# Altium PCB Copy of MB1363.PcbDoc (part 4 of 6)
Units mm, origin at the board's own origin, x right, y up, seen from the top; angles counter-clockwise.
Board outline 60.78 x 109.88 mm, 4 copper layers (Top Layer, Signal Layer 1, Signal Layer 2, Bottom Layer), stack 0.453 mm thick; 231 components, 215 nets, 716 pads, 2915 vias.
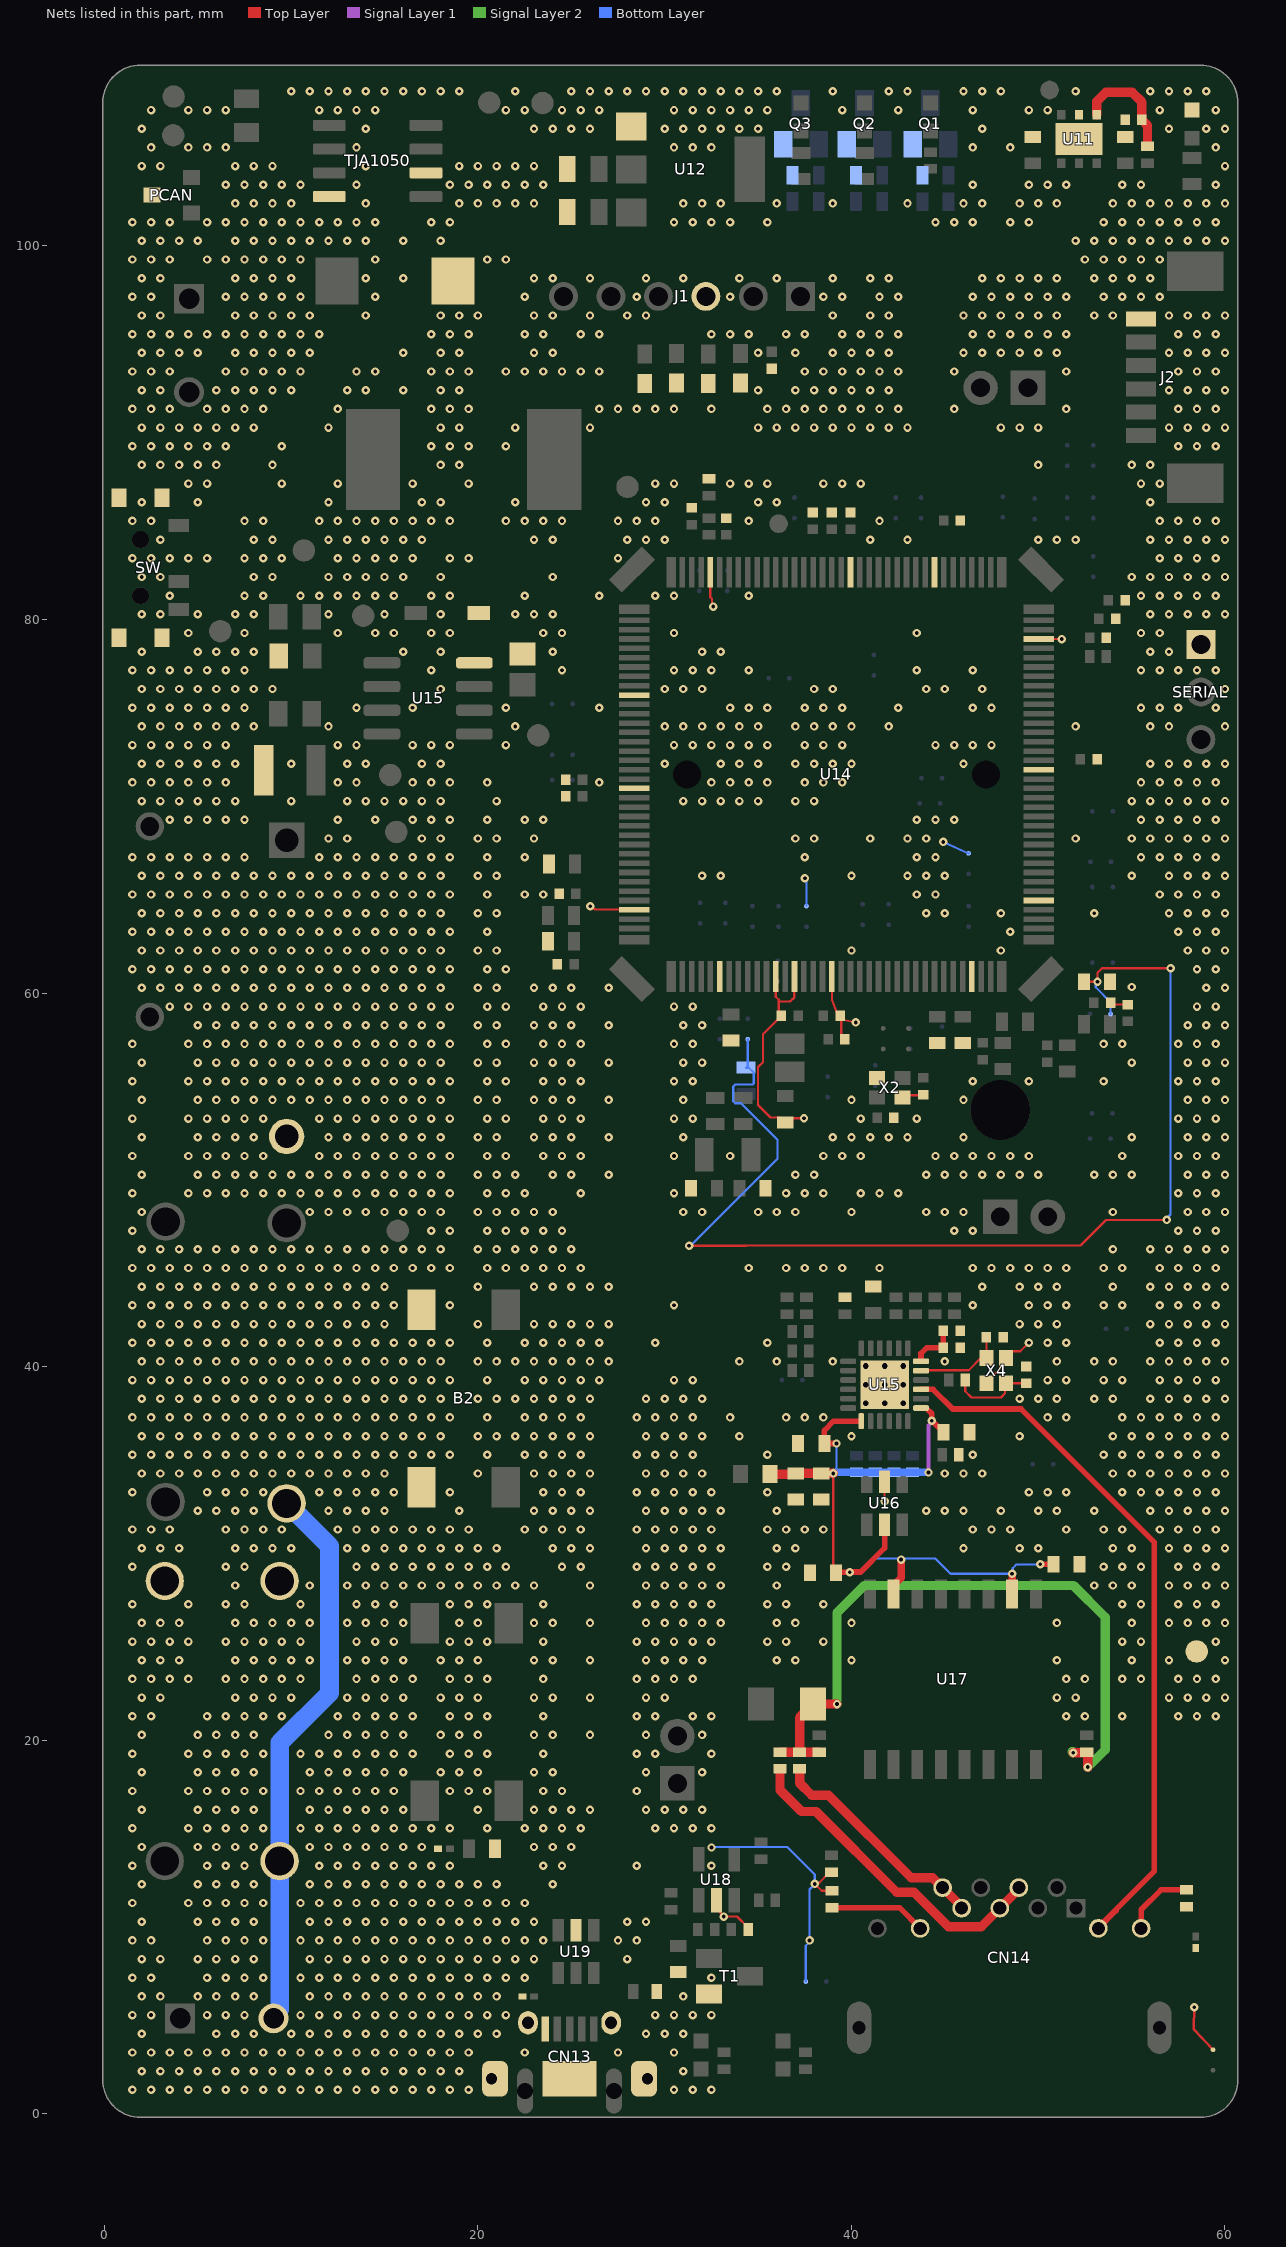
[diagram p5: the nets of this part, all layers, seen from the top]

## Via types
v1: diameter 0.45, hole 0.2, Top Layer to Bottom Layer, tented both sides, 2902 vias
v2: diameter 0.6, hole 0.3, Top Layer to Bottom Layer, tented both sides, 13 vias

## Nets (pads, with @x,y where several pads share a name; then routed paths per layer and width w, separated by ;. In a path a pad name is that pad's centre, name@x,y a point inside that pad or via, vN(x,y) a via of type N, cw(c..) or ccw(c..) an arc to the next point about the centre after c; other vN are vias at no path point) (continued)
GND: B2.3 B2.4 C1.1 C2.2 C3.2 C4.2 C38.2 C39.1 C40.1 C41.1 C42.1 C46.1 C47.1 C48.1 C49.1 C50.1 C51.2 C52.1 C53.2 C54.1 C55.1 C56.1 C57.1 C58.1 C59.1 C60.1 C61.2 C62.2 C63.1 C64.1 C65.1 C66.1 C67.1 C68.1 C74.2 C75.1 C76.2 C77.2 C78.2 C79.1 C80.1 C81.1 C82.1 C83.1 C84.1 C85.2 C86.1 C87.1 C88.1 C89.1 C91.1 CN13.5 CN13.6 CN13.7 CN13.8 CN13.9 CN13.10 D1.2 D2.2 D3.2 D4.2 D6.A DP3.2 DP4.2 DP5.A GND.1 J1.3 J2.6 LD5.2 PCAN.3 Q1.2 Q2.2 Q3.2 R2.2 R33.2 R36.2 R38.2 R45.2 R54.2 R60.1 R61.1 R62.1 R66.1 R67.1 R71.1 R72.1 R73.1 SB61.1 SB74.1 SB101.2 SB102.2 SERIAL.1 SW.G1 SW.G2 SW.G3 SW.G4 T1.2 TJA1050.2 TJA1050.8 U11.2 U11.EP U12.1 U14.6 U14.12 U14.14 U14.18 U14.33 U14.41 U14.55 U14.69 U14.80 U14.89 U14.104 U14.118 U14.128 U14.141 U15.4@19.825,77.68 U15.EP U16.2 U18.2 U19.2 U20.2 U21.2 U22.2 U23.2 X2.2 X2.4 X4.2 X4.4 | length 51.9
  Top Layer w0.12: v1(26.025,64.65) 26.114,64.65 26.286,64.478 28.367,64.478 U14.141@28.391,64.454 ; U14.104@32.466,82.529 32.457,81.764 32.453,81.44 32.453,81.439 32.453,81.192 32.553,81.091 32.553,80.754 v1(32.616,80.691) ; U18.2@32.791,11.424 ccw(c33.974,11.424) 33.137,10.588 v1@33.112,10.613 ; v1@33.138,10.587 v1(33.175,10.55) 33.89,10.55 34.491,9.949 R66.1@34.491,9.854 ; U14.12@35.966,60.879 36.05,60.114 35.966,60.114 35.966,59.798 36.125,59.639 36.125,59.55 ; 36.125,59.075 36.125,59.55 ; C64.1@36.266,58.779 36.266,58.754 36.071,58.559 36.046,58.559 35.275,57.788 35.275,56.3 35.016,56.041 35.016,54.009 35.686,53.339 36.206,53.339 C75.1@36.466,53.079 ; 36.841,59.666 36.725,59.55 36.125,59.55 ; 36.842,59.666 ccw(c36.831,59.786) 36.951,59.786 36.951,60.114 U14.14@36.966,60.879 ; C75.1@36.851,53.075 C75.1@36.466,53.079 ; v1(37.475,53.3) 36.687,53.3 C75.1@36.466,53.079 ; R60.1@38.941,12.923 38.846,12.923 38.287,12.363 38.113,12.363 v1(38.05,12.3) 38.421,11.929 R62.1@38.966,11.929 ; U14.18@38.966,60.879 38.975,60.114 38.975,59.625 39.221,58.999 C65.1@39.416,58.779 ; C68.1@39.666,57.529 39.471,57.749 39.471,58.559 C65.1@39.416,58.779 ; v1(40.25,58.425) 39.611,58.559 C65.1@39.416,58.779 ; v1(41.791,32.779) U16.2@41.791,33.829 ; X2.2@42.741,54.404 43.106,54.525 43.646,54.525 C74.2@43.866,54.554 ; X4.4@47.241,39.104 47.241,39.154 47.976,39.889 47.976,40.139 X4.2@48.291,40.454 48.291,40.504 48.606,40.819 49.061,40.819 v1(49.518,41.276) ; U14.69@50.041,78.954 50.043,78.952 51.273,78.952 v1(51.275,78.95) ; C61.2@53.891,59.479 53.991,59.379 C62.2@54.816,59.379 ; v1(58.375,5.7) 58.346,4.558 58.346,4.508 58.379,4.474 SB102.2@59.375,3.425
  Bottom Layer w0.12: v1@32.525,14.276 36.574,14.276 38.05,12.8 v1(38.05,12.3) 38.05,12.277 37.775,12.002 v1(37.775,9.275) 37.775,9.186 37.575,8.986 SB101.2@37.575,7.075 ; v1(37.525,66.15) 37.609,66.066 SB74.1@37.609,64.653 ; v1(44.934,68.089) SB61.1@46.291,67.479
  other v1: 1.518,1.276 2.518,1.276 3.518,1.276 4.518,1.276 5.518,1.276 6.518,1.276 7.518,1.276 8.518,1.276 9.518,1.276 10.518,1.276 11.518,1.276 12.518,1.276 13.518,1.276 14.518,1.276 15.518,1.276 16.518,1.276 17.518,1.276 18.518,1.276 19.518,1.276 30.518,1.276 31.518,1.276 32.518,1.276 2.018,2.276 3.018,2.276 4.018,2.276 5.018,2.276 6.018,2.276 7.018,2.276 8.018,2.276 9.018,2.276 10.018,2.276 11.018,2.276 12.018,2.276 13.018,2.276 14.018,2.276 15.018,2.276 16.018,2.276 17.018,2.276 18.018,2.276 19.018,2.276 31.018,2.276 1.518,3.276 2.518,3.276 3.518,3.276 4.518,3.276 5.518,3.276 6.518,3.276 7.518,3.276 8.518,3.276 9.518,3.276 10.518,3.276 11.518,3.276 12.518,3.276 13.518,3.276 14.518,3.276 15.518,3.276 16.518,3.276 17.518,3.276 18.518,3.276 19.518,3.276 22.518,3.276 27.518,3.276 30.518,3.276 2.018,4.276 6.018,4.276 7.018,4.276 8.018,4.276 10.018,4.276 11.018,4.276 12.018,4.276 13.018,4.276 14.018,4.276 15.018,4.276 16.018,4.276 17.018,4.276 18.018,4.276 19.018,4.276 20.018,4.276 21.018,4.276 29.018,4.276 30.018,4.276 31.018,4.276 1.518,5.276 2.518,5.276 5.518,5.276 6.518,5.276 7.518,5.276 10.518,5.276 11.518,5.276 12.518,5.276 13.518,5.276 14.518,5.276 15.518,5.276 16.518,5.276 17.518,5.276 18.518,5.276 19.518,5.276 20.518,5.276 21.518,5.276 29.518,5.276 30.518,5.276 31.518,5.276 32.518,5.276 2.018,6.276 3.018,6.276 5.018,6.276 6.018,6.276 7.018,6.276 8.018,6.276 11.018,6.276 12.018,6.276 13.018,6.276 14.018,6.276 15.018,6.276 16.018,6.276 17.018,6.276 18.018,6.276 19.018,6.276 20.018,6.276 21.018,6.276 31.018,6.276 1.518,7.276 2.518,7.276 5.518,7.276 6.518,7.276 7.518,7.276 8.518,7.276 10.518,7.276 11.518,7.276 12.518,7.276 13.518,7.276 14.518,7.276 15.518,7.276 16.518,7.276 17.518,7.276 18.518,7.276 19.518,7.276 20.518,7.276 21.518,7.276 22.518,7.276 32.518,7.276 2.018,8.276 3.018,8.276 5.018,8.276 6.018,8.276 7.018,8.276 8.018,8.276 11.018,8.276 12.018,8.276 13.018,8.276 14.018,8.276 15.018,8.276 16.018,8.276 17.018,8.276 18.018,8.276 19.018,8.276 20.018,8.276 21.018,8.276 22.018,8.276 23.018,8.276 28.018,8.276 1.518,9.276 2.518,9.276 5.518,9.276 6.518,9.276 7.518,9.276 8.518,9.276 10.518,9.276 11.518,9.276 12.518,9.276 13.518,9.276 14.518,9.276 15.518,9.276 16.518,9.276 17.518,9.276 18.518,9.276 19.518,9.276 20.518,9.276 21.518,9.276 22.518,9.276 23.518,9.276 27.518,9.276 28.518,9.276 2.018,10.276 5.018,10.276 6.018,10.276 7.018,10.276 8.018,10.276 11.018,10.276 12.018,10.276 13.018,10.276 14.018,10.276 15.018,10.276 16.018,10.276 17.018,10.276 18.018,10.276 19.018,10.276 20.018,10.276 21.018,10.276 22.018,10.276 23.018,10.276 28.018,10.276 29.018,10.276 1.518,11.276 4.518,11.276 5.518,11.276 6.518,11.276 7.518,11.276 8.518,11.276 10.518,11.276 11.518,11.276 12.518,11.276 13.518,11.276 14.518,11.276 15.518,11.276 16.518,11.276 17.518,11.276 18.518,11.276 19.518,11.276 20.518,11.276 21.518,11.276 22.518,11.276 2.018,12.276 5.018,12.276 6.018,12.276 7.018,12.276 8.018,12.276 11.018,12.276 12.018,12.276 13.018,12.276 14.018,12.276 15.018,12.276 16.018,12.276 17.018,12.276 18.018,12.276 19.018,12.276 20.018,12.276 21.018,12.276 24.018,12.276 1.518,13.276 5.518,13.276 6.518,13.276 7.518,13.276 11.518,13.276 12.518,13.276 13.518,13.276 14.518,13.276 15.518,13.276 16.518,13.276 17.518,13.276 18.518,13.276 23.518,13.276 24.518,13.276 28.518,13.276 32.518,13.276 32.525,14.25 2.018,14.276 5.018,14.276 6.018,14.276 7.018,14.276 8.018,14.276 11.018,14.276 12.018,14.276 13.018,14.276 14.018,14.276 15.018,14.276 16.018,14.276 17.018,14.276 23.018,14.276 24.018,14.276 25.018,14.276 1.518,15.276 4.518,15.276 5.518,15.276 6.518,15.276 7.518,15.276 8.518,15.276 10.518,15.276 11.518,15.276 12.518,15.276 13.518,15.276 14.518,15.276 15.518,15.276 16.518,15.276 17.518,15.276 18.518,15.276 20.518,15.276 22.518,15.276 23.518,15.276 24.518,15.276 25.518,15.276 29.518,15.276 30.518,15.276 31.518,15.276 32.518,15.276 2.018,16.276 5.018,16.276 6.018,16.276 7.018,16.276 8.018,16.276 11.018,16.276 12.018,16.276 13.018,16.276 14.018,16.276 15.018,16.276 16.018,16.276 20.018,16.276 23.018,16.276 24.018,16.276 25.018,16.276 26.018,16.276 29.018,16.276 30.018,16.276 31.018,16.276 32.018,16.276 1.518,17.276 4.518,17.276 5.518,17.276 6.518,17.276 7.518,17.276 8.518,17.276 10.518,17.276 11.518,17.276 12.518,17.276 13.518,17.276 14.518,17.276 15.518,17.276 18.518,17.276 19.518,17.276 20.518,17.276 23.518,17.276 24.518,17.276 28.518,17.276 2.018,18.276 5.018,18.276 6.018,18.276 7.018,18.276 8.018,18.276 11.018,18.276 12.018,18.276 13.018,18.276 14.018,18.276 15.018,18.276 16.018,18.276 18.018,18.276 19.018,18.276 20.018,18.276 23.018,18.276 24.018,18.276 29.018,18.276 32.018,18.276 1.518,19.276 4.518,19.276 5.518,19.276 6.518,19.276 7.518,19.276 8.518,19.276 10.518,19.276 11.518,19.276 12.518,19.276 13.518,19.276 14.518,19.276 15.518,19.276 16.518,19.276 18.518,19.276 19.518,19.276 20.518,19.276 23.518,19.276 28.518,19.276 29.518,19.276 32.518,19.276 2.018,20.276 5.018,20.276 6.018,20.276 7.018,20.276 8.018,20.276 12.018,20.276 13.018,20.276 14.018,20.276 15.018,20.276 16.018,20.276 18.018,20.276 19.018,20.276 20.018,20.276 23.018,20.276 24.018,20.276 26.018,20.276 29.018,20.276 32.018,20.276 1.518,21.276 2.518,21.276 5.518,21.276 6.518,21.276 7.518,21.276 8.518,21.276 9.518,21.276 12.518,21.276 13.518,21.276 14.518,21.276 15.518,21.276 16.518,21.276 18.518,21.276 19.518,21.276 20.518,21.276 23.518,21.276 28.518,21.276 29.518,21.276 31.518,21.276 32.518,21.276 51.518,21.276 52.518,21.276 54.518,21.276 57.518,21.276 58.518,21.276 59.518,21.276 2.018,22.276 3.018,22.276 7.018,22.276 8.018,22.276 9.018,22.276 10.018,22.276 13.018,22.276 14.018,22.276 15.018,22.276 16.018,22.276 18.018,22.276 19.018,22.276 20.018,22.276 23.018,22.276 24.018,22.276 26.018,22.276 29.018,22.276 30.018,22.276 51.018,22.276 52.018,22.276 57.018,22.276 58.018,22.276 59.018,22.276 60.018,22.276 1.518,23.276 2.518,23.276 3.518,23.276 4.518,23.276 6.518,23.276 7.518,23.276 8.518,23.276 9.518,23.276 10.518,23.276 13.518,23.276 14.518,23.276 15.518,23.276 16.518,23.276 18.518,23.276 19.518,23.276 20.518,23.276 23.518,23.276 28.518,23.276 29.518,23.276 30.518,23.276 31.518,23.276 51.518,23.276 52.518,23.276 54.518,23.276 55.518,23.276 57.518,23.276 58.518,23.276 59.518,23.276 2.018,24.276 3.018,24.276 4.018,24.276 7.018,24.276 8.018,24.276 9.018,24.276 10.018,24.276 11.018,24.276 13.018,24.276 14.018,24.276 15.018,24.276 16.018,24.276 18.018,24.276 19.018,24.276 20.018,24.276 23.018,24.276 24.018,24.276 26.018,24.276 29.018,24.276 30.018,24.276 31.018,24.276 32.018,24.276 36.018,24.276 37.018,24.276 40.018,24.276 51.018,24.276 55.018,24.276 57.018,24.276 60.018,24.276 1.518,25.276 2.518,25.276 3.518,25.276 4.518,25.276 6.518,25.276 7.518,25.276 8.518,25.276 9.518,25.276 10.518,25.276 13.518,25.276 14.518,25.276 15.518,25.276 18.518,25.276 19.518,25.276 20.518,25.276 23.518,25.276 28.518,25.276 29.518,25.276 30.518,25.276 31.518,25.276 32.518,25.276 35.518,25.276 36.518,25.276 38.518,25.276 54.518,25.276 55.518,25.276 59.518,25.276 2.018,26.276 3.018,26.276 4.018,26.276 7.018,26.276 8.018,26.276 9.018,26.276 10.018,26.276 11.018,26.276 13.018,26.276 14.018,26.276 15.018,26.276 16.018,26.276 19.018,26.276 20.018,26.276 23.018,26.276 24.018,26.276 26.018,26.276 29.018,26.276 30.018,26.276 31.018,26.276 32.018,26.276 33.018,26.276 36.018,26.276 37.018,26.276 40.018,26.276 51.018,26.276 55.018,26.276 57.018,26.276 58.018,26.276 59.018,26.276 60.018,26.276 1.518,27.276 4.518,27.276 6.518,27.276 7.518,27.276 10.518,27.276 13.518,27.276 14.518,27.276 15.518,27.276 18.518,27.276 19.518,27.276 20.518,27.276 23.518,27.276 28.518,27.276 29.518,27.276 30.518,27.276 31.518,27.276 32.518,27.276 35.518,27.276 36.518,27.276 38.518,27.276 54.518,27.276 55.518,27.276 57.518,27.276 58.518,27.276 59.518,27.276 7.018,28.276 11.018,28.276 13.018,28.276 14.018,28.276 15.018,28.276 16.018,28.276 17.018,28.276 18.018,28.276 19.018,28.276 20.018,28.276 21.018,28.276 22.018,28.276 23.018,28.276 26.018,28.276 29.018,28.276 30.018,28.276 31.018,28.276 32.018,28.276 33.018,28.276 36.018,28.276 53.018,28.276 54.018,28.276 55.018,28.276 57.018,28.276 58.018,28.276 59.018,28.276 60.018,28.276 1.518,29.276 6.518,29.276 7.518,29.276 13.518,29.276 14.518,29.276 15.518,29.276 16.518,29.276 17.518,29.276 18.518,29.276 19.518,29.276 20.518,29.276 21.518,29.276 24.518,29.276 25.518,29.276 28.518,29.276 29.518,29.276 30.518,29.276 31.518,29.276 32.518,29.276 35.518,29.276 36.518,29.276 53.518,29.276 54.518,29.276 55.518,29.276 57.518,29.276 58.518,29.276 59.518,29.276 2.018,30.276 3.018,30.276 4.018,30.276 7.018,30.276 8.018,30.276 9.018,30.276 10.018,30.276 13.018,30.276 14.018,30.276 15.018,30.276 16.018,30.276 17.018,30.276 18.018,30.276 19.018,30.276 20.018,30.276 21.018,30.276 24.018,30.276 25.018,30.276 26.018,30.276 29.018,30.276 30.018,30.276 31.018,30.276 32.018,30.276 33.018,30.276 36.018,30.276 37.018,30.276 46.018,30.276 49.018,30.276 50.018,30.276 54.018,30.276 55.018,30.276 57.018,30.276 58.018,30.276 59.018,30.276 60.018,30.276 1.518,31.276 2.518,31.276 3.518,31.276 6.518,31.276 7.518,31.276 8.518,31.276 9.518,31.276 12.518,31.276 13.518,31.276 14.518,31.276 15.518,31.276 16.518,31.276 17.518,31.276 18.518,31.276 19.518,31.276 22.518,31.276 23.518,31.276 24.518,31.276 25.518,31.276 28.518,31.276 29.518,31.276 30.518,31.276 31.518,31.276 32.518,31.276 35.518,31.276 36.518,31.276 37.518,31.276 38.518,31.276 46.518,31.276 47.518,31.276 48.518,31.276 51.518,31.276 53.518,31.276 54.518,31.276 56.518,31.276 57.518,31.276 58.518,31.276 59.518,31.276 5.018,32.276 6.018,32.276 7.018,32.276 8.018,32.276 12.018,32.276 13.018,32.276 14.018,32.276 15.018,32.276 19.018,32.276 23.018,32.276 24.018,32.276 25.018,32.276 26.018,32.276 29.018,32.276 30.018,32.276 31.018,32.276 32.018,32.276 33.018,32.276 36.018,32.276 44.018,32.276 45.018,32.276 46.018,32.276 48.018,32.276 50.018,32.276 51.018,32.276 53.018,32.276 56.018,32.276 57.018,32.276 58.018,32.276 59.018,32.276 60.018,32.276 1.518,33.276 5.518,33.276 6.518,33.276 7.518,33.276 8.518,33.276 11.518,33.276 12.518,33.276 13.518,33.276 14.518,33.276 15.518,33.276 18.518,33.276 23.518,33.276 24.518,33.276 25.518,33.276 28.518,33.276 29.518,33.276 30.518,33.276 31.518,33.276 32.518,33.276 35.518,33.276 49.518,33.276 50.518,33.276 51.518,33.276 54.518,33.276 55.518,33.276 56.518,33.276 57.518,33.276 58.518,33.276 59.518,33.276 2.018,34.276 3.018,34.276 4.018,34.276 5.018,34.276 6.018,34.276 7.018,34.276 8.018,34.276 9.018,34.276 10.018,34.276 11.018,34.276 12.018,34.276 13.018,34.276 14.018,34.276 15.018,34.276 20.018,34.276 23.018,34.276 24.018,34.276 25.018,34.276 26.018,34.276 29.018,34.276 30.018,34.276 31.018,34.276 32.018,34.276 45.018,34.276 46.018,34.276 47.018,34.276 54.018,34.276 55.018,34.276 56.018,34.276 57.018,34.276 58.018,34.276 59.018,34.276 60.018,34.276 1.518,35.276 2.518,35.276 3.518,35.276 4.518,35.276 5.518,35.276 6.518,35.276 7.518,35.276 8.518,35.276 9.518,35.276 10.518,35.276 11.518,35.276 12.518,35.276 13.518,35.276 14.518,35.276 15.518,35.276 16.518,35.276 17.518,35.276 18.518,35.276 20.518,35.276 22.518,35.276 23.518,35.276 24.518,35.276 25.518,35.276 28.518,35.276 29.518,35.276 30.518,35.276 31.518,35.276 35.518,35.276 46.518,35.276 53.518,35.276 54.518,35.276 55.518,35.276 56.518,35.276 57.518,35.276 58.518,35.276 59.518,35.276 2.018,36.276 3.018,36.276 4.018,36.276 5.018,36.276 6.018,36.276 7.018,36.276 8.018,36.276 9.018,36.276 10.018,36.276 11.018,36.276 12.018,36.276 13.018,36.276 14.018,36.276 15.018,36.276 16.018,36.276 17.018,36.276 18.018,36.276 20.018,36.276 21.018,36.276 22.018,36.276 23.018,36.276 24.018,36.276 25.018,36.276 26.018,36.276 29.018,36.276 30.018,36.276 31.018,36.276 32.018,36.276 34.018,36.276 40.018,36.276 49.018,36.276 54.018,36.276 55.018,36.276 56.018,36.276 57.018,36.276 58.018,36.276 59.018,36.276 60.018,36.276 1.518,37.276 2.518,37.276 3.518,37.276 4.518,37.276 5.518,37.276 6.518,37.276 7.518,37.276 8.518,37.276 9.518,37.276 10.518,37.276 11.518,37.276 12.518,37.276 13.518,37.276 14.518,37.276 15.518,37.276 16.518,37.276 17.518,37.276 18.518,37.276 20.518,37.276 22.518,37.276 23.518,37.276 24.518,37.276 25.518,37.276 28.518,37.276 29.518,37.276 30.518,37.276 31.518,37.276 33.518,37.276 36.518,37.276 37.518,37.276 38.518,37.276 50.518,37.276 51.518,37.276 54.518,37.276 55.518,37.276 56.518,37.276 57.518,37.276 58.518,37.276 59.518,37.276 2.018,38.276 3.018,38.276 4.018,38.276 5.018,38.276 6.018,38.276 7.018,38.276 8.018,38.276 9.018,38.276 10.018,38.276 11.018,38.276 12.018,38.276 13.018,38.276 14.018,38.276 15.018,38.276 16.018,38.276 17.018,38.276 18.018,38.276 20.018,38.276 21.018,38.276 22.018,38.276 23.018,38.276 24.018,38.276 25.018,38.276 26.018,38.276 29.018,38.276 30.018,38.276 31.018,38.276 32.018,38.276 49.018,38.276 50.018,38.276 51.018,38.276 53.018,38.276 54.018,38.276 56.018,38.276 57.018,38.276 58.018,38.276 59.018,38.276 60.018,38.276 1.518,39.276 2.518,39.276 3.518,39.276 4.518,39.276 5.518,39.276 6.518,39.276 7.518,39.276 8.518,39.276 9.518,39.276 10.518,39.276 11.518,39.276 12.518,39.276 13.518,39.276 14.518,39.276 15.518,39.276 16.518,39.276 17.518,39.276 18.518,39.276 20.518,39.276 22.518,39.276 23.518,39.276 24.518,39.276 25.518,39.276 26.518,39.276 30.518,39.276 31.518,39.276 50.518,39.276 51.518,39.276 53.518,39.276 54.518,39.276 56.518,39.276 57.518,39.276 58.518,39.276 59.518,39.276 2.018,40.276 3.018,40.276 4.018,40.276 5.018,40.276 6.018,40.276 7.018,40.276 8.018,40.276 9.018,40.276 10.018,40.276 11.018,40.276 12.018,40.276 13.018,40.276 14.018,40.276 15.018,40.276 16.018,40.276 17.018,40.276 18.018,40.276 20.018,40.276 21.018,40.276 22.018,40.276 23.018,40.276 24.018,40.276 25.018,40.276 26.018,40.276 27.018,40.276 34.018,40.276 36.018,40.276 39.018,40.276 45.018,40.276 51.018,40.276 53.018,40.276 54.018,40.276 56.018,40.276 57.018,40.276 58.018,40.276 59.018,40.276 60.018,40.276 1.518,41.276 2.518,41.276 3.518,41.276 4.518,41.276 5.518,41.276 6.518,41.276 7.518,41.276 8.518,41.276 9.518,41.276 10.518,41.276 11.518,41.276 12.518,41.276 13.518,41.276 14.518,41.276 15.518,41.276 16.518,41.276 17.518,41.276 18.518,41.276 20.518,41.276 22.518,41.276 23.518,41.276 24.518,41.276 25.518,41.276 26.518,41.276 29.518,41.276 35.518,41.276 50.518,41.276 51.518,41.276 56.518,41.276 57.518,41.276 58.518,41.276 59.518,41.276 2.018,42.276 3.018,42.276 4.018,42.276 5.018,42.276 6.018,42.276 7.018,42.276 8.018,42.276 9.018,42.276 10.018,42.276 11.018,42.276 12.018,42.276 13.018,42.276 14.018,42.276 15.018,42.276 20.018,42.276 23.018,42.276 24.018,42.276 25.018,42.276 26.018,42.276 27.018,42.276 49.018,42.276 50.018,42.276 51.018,42.276 56.018,42.276 57.018,42.276 58.018,42.276 59.018,42.276 60.018,42.276 1.518,43.276 2.518,43.276 3.518,43.276 4.518,43.276 5.518,43.276 6.518,43.276 7.518,43.276 8.518,43.276 9.518,43.276 10.518,43.276 11.518,43.276 12.518,43.276 13.518,43.276 14.518,43.276 15.518,43.276 18.518,43.276 30.518,43.276 46.518,43.276 49.518,43.276 50.518,43.276 51.518,43.276 53.518,43.276 54.518,43.276 56.518,43.276 57.518,43.276 58.518,43.276 59.518,43.276 2.018,44.276 3.018,44.276 4.018,44.276 5.018,44.276 6.018,44.276 7.018,44.276 8.018,44.276 9.018,44.276 10.018,44.276 11.018,44.276 12.018,44.276 13.018,44.276 14.018,44.276 15.018,44.276 20.018,44.276 23.018,44.276 24.018,44.276 25.018,44.276 26.018,44.276 27.018,44.276 47.018,44.276 49.018,44.276 50.018,44.276 51.018,44.276 54.018,44.276 56.018,44.276 57.018,44.276 58.018,44.276 59.018,44.276 60.018,44.276 1.518,45.276 2.518,45.276 3.518,45.276 4.518,45.276 5.518,45.276 6.518,45.276 7.518,45.276 8.518,45.276 9.518,45.276 10.518,45.276 11.518,45.276 12.518,45.276 13.518,45.276 14.518,45.276 15.518,45.276 16.518,45.276 17.518,45.276 18.518,45.276 20.518,45.276 21.518,45.276 22.518,45.276 23.518,45.276 24.518,45.276 25.518,45.276 34.518,45.276 36.518,45.276 37.518,45.276 38.518,45.276 39.518,45.276 41.518,45.276 46.518,45.276 47.518,45.276 48.518,45.276 49.518,45.276 50.518,45.276 51.518,45.276 53.518,45.276 54.518,45.276 56.518,45.276 57.518,45.276 58.518,45.276 59.518,45.276 2.018,46.276 3.018,46.276 4.018,46.276 5.018,46.276 6.018,46.276 7.018,46.276 8.018,46.276 9.018,46.276 10.018,46.276 11.018,46.276 12.018,46.276 13.018,46.276 14.018,46.276 15.018,46.276 16.018,46.276 17.018,46.276 18.018,46.276 20.018,46.276 21.018,46.276 22.018,46.276 23.018,46.276 24.018,46.276 25.018,46.276 54.018,46.276 56.018,46.276 57.018,46.276 58.018,46.276 59.018,46.276 60.018,46.276 1.518,47.276 17.518,47.276 18.518,47.276 20.518,47.276 21.518,47.276 22.518,47.276 23.518,47.276 24.518,47.276 45.518,47.276 46.518,47.276 57.518,47.276 58.518,47.276 59.518,47.276 2.018,48.276 11.018,48.276 12.018,48.276 13.018,48.276 14.018,48.276 15.018,48.276 16.018,48.276 17.018,48.276 18.018,48.276 20.018,48.276 21.018,48.276 22.018,48.276 23.018,48.276 24.018,48.276 31.018,48.276 32.018,48.276 35.018,48.276 36.018,48.276 37.018,48.276 40.018,48.276 44.018,48.276 45.018,48.276 46.018,48.276 54.018,48.276 58.018,48.276 59.018,48.276 60.018,48.276 1.518,49.276 4.518,49.276 5.518,49.276 6.518,49.276 7.518,49.276 8.518,49.276 9.518,49.276 10.518,49.276 11.518,49.276 12.518,49.276 13.518,49.276 14.518,49.276 15.518,49.276 16.518,49.276 17.518,49.276 18.518,49.276 20.518,49.276 21.518,49.276 22.518,49.276 25.518,49.276 30.518,49.276 36.518,49.276 37.518,49.276 38.518,49.276 40.518,49.276 41.518,49.276 42.518,49.276 57.518,49.276 58.518,49.276 59.518,49.276 2.018,50.276 5.018,50.276 6.018,50.276 7.018,50.276 8.018,50.276 9.018,50.276 10.018,50.276 11.018,50.276 12.018,50.276 13.018,50.276 14.018,50.276 15.018,50.276 16.018,50.276 17.018,50.276 18.018,50.276 20.018,50.276 21.018,50.276 22.018,50.276 24.018,50.276 25.018,50.276 27.018,50.276 37.018,50.276 38.018,50.276 44.018,50.276 45.018,50.276 46.018,50.276 47.018,50.276 48.018,50.276 49.018,50.276 50.018,50.276 53.018,50.276 54.018,50.276 55.018,50.276 58.018,50.276 59.018,50.276 60.018,50.276 1.518,51.276 4.518,51.276 5.518,51.276 6.518,51.276 7.518,51.276 8.518,51.276 11.518,51.276 12.518,51.276 13.518,51.276 14.518,51.276 15.518,51.276 16.518,51.276 17.518,51.276 18.518,51.276 20.518,51.276 21.518,51.276 23.518,51.276 24.518,51.276 25.518,51.276 30.518,51.276 33.518,51.276 38.518,51.276 39.518,51.276 40.518,51.276 44.518,51.276 45.518,51.276 46.518,51.276 47.518,51.276 48.518,51.276 49.518,51.276 54.518,51.276 57.518,51.276 58.518,51.276 59.518,51.276 2.018,52.276 5.018,52.276 6.018,52.276 7.018,52.276 8.018,52.276 12.018,52.276 13.018,52.276 14.018,52.276 15.018,52.276 16.018,52.276 17.018,52.276 18.018,52.276 20.018,52.276 21.018,52.276 23.018,52.276 24.018,52.276 25.018,52.276 27.018,52.276 31.018,52.276 39.018,52.276 40.018,52.276 41.018,52.276 42.018,52.276 43.018,52.276 46.018,52.276 55.018,52.276 58.018,52.276 59.018,52.276 60.018,52.276 1.518,53.276 4.518,53.276 5.518,53.276 6.518,53.276 7.518,53.276 8.518,53.276 11.518,53.276 12.518,53.276 13.518,53.276 14.518,53.276 15.518,53.276 16.518,53.276 17.518,53.276 18.518,53.276 20.518,53.276 21.518,53.276 23.518,53.276 24.518,53.276 25.518,53.276 30.518,53.276 31.518,53.276 40.518,53.276 43.518,53.276 57.518,53.276 58.518,53.276 59.518,53.276 2.018,54.276 5.018,54.276 6.018,54.276 7.018,54.276 8.018,54.276 9.018,54.276 10.018,54.276 11.018,54.276 12.018,54.276 13.018,54.276 14.018,54.276 15.018,54.276 16.018,54.276 17.018,54.276 18.018,54.276 20.018,54.276 21.018,54.276 23.018,54.276 24.018,54.276 25.018,54.276 27.018,54.276 31.018,54.276 40.018,54.276 46.018,54.276 58.018,54.276 59.018,54.276 60.018,54.276 1.518,55.276 4.518,55.276 5.518,55.276 6.518,55.276 7.518,55.276 8.518,55.276 9.518,55.276 10.518,55.276 11.518,55.276 12.518,55.276 13.518,55.276 14.518,55.276 15.518,55.276 16.518,55.276 17.518,55.276 18.518,55.276 20.518,55.276 21.518,55.276 23.518,55.276 24.518,55.276 25.518,55.276 30.518,55.276 31.518,55.276 46.518,55.276 49.518,55.276 53.518,55.276 57.518,55.276 58.518,55.276 59.518,55.276 2.018,56.276 5.018,56.276 6.018,56.276 7.018,56.276 8.018,56.276 9.018,56.276 10.018,56.276 11.018,56.276 12.018,56.276 13.018,56.276 14.018,56.276 15.018,56.276 16.018,56.276 17.018,56.276 18.018,56.276 20.018,56.276 21.018,56.276 23.018,56.276 24.018,56.276 25.018,56.276 27.018,56.276 31.018,56.276 32.018,56.276 55.018,56.276 58.018,56.276 59.018,56.276 60.018,56.276 1.518,57.276 4.518,57.276 5.518,57.276 6.518,57.276 7.518,57.276 8.518,57.276 9.518,57.276 10.518,57.276 11.518,57.276 12.518,57.276 13.518,57.276 14.518,57.276 15.518,57.276 16.518,57.276 17.518,57.276 18.518,57.276 20.518,57.276 21.518,57.276 23.518,57.276 24.518,57.276 25.518,57.276 30.518,57.276 31.518,57.276 53.518,57.276 54.518,57.276 57.518,57.276 58.518,57.276 59.518,57.276 5.018,58.276 6.018,58.276 7.018,58.276 8.018,58.276 9.018,58.276 10.018,58.276 11.018,58.276 12.018,58.276 13.018,58.276 14.018,58.276 15.018,58.276 16.018,58.276 17.018,58.276 18.018,58.276 20.018,58.276 21.018,58.276 23.018,58.276 24.018,58.276 25.018,58.276 27.018,58.276 31.018,58.276 32.018,58.276 58.018,58.276 59.018,58.276 60.018,58.276 3.518,59.276 4.518,59.276 5.518,59.276 6.518,59.276 7.518,59.276 8.518,59.276 9.518,59.276 10.518,59.276 11.518,59.276 12.518,59.276 13.518,59.276 14.518,59.276 15.518,59.276 16.518,59.276 17.518,59.276 18.518,59.276 20.518,59.276 21.518,59.276 23.518,59.276 24.518,59.276 25.518,59.276 30.518,59.276 31.518,59.276 58.518,59.276 59.518,59.276 2.018,60.276 3.018,60.276 4.018,60.276 5.018,60.276 6.018,60.276 7.018,60.276 8.018,60.276 9.018,60.276 10.018,60.276 11.018,60.276 12.018,60.276 13.018,60.276 14.018,60.276 15.018,60.276 16.018,60.276 17.018,60.276 18.018,60.276 20.018,60.276 21.018,60.276 23.018,60.276 24.018,60.276 25.018,60.276 27.018,60.276 59.018,60.276 60.018,60.276 55.025,60.325 1.518,61.276 2.518,61.276 3.518,61.276 4.518,61.276 5.518,61.276 6.518,61.276 7.518,61.276 8.518,61.276 9.518,61.276 10.518,61.276 11.518,61.276 12.518,61.276 13.518,61.276 14.518,61.276 15.518,61.276 16.518,61.276 17.518,61.276 18.518,61.276 20.518,61.276 21.518,61.276 58.518,61.276 59.518,61.276 2.018,62.276 3.018,62.276 4.018,62.276 5.018,62.276 6.018,62.276 7.018,62.276 8.018,62.276 9.018,62.276 10.018,62.276 11.018,62.276 12.018,62.276 13.018,62.276 14.018,62.276 15.018,62.276 16.018,62.276 17.018,62.276 18.018,62.276 20.018,62.276 21.018,62.276 40.018,62.276 48.018,62.276 58.018,62.276 59.018,62.276 60.018,62.276 1.518,63.276 2.518,63.276 3.518,63.276 4.518,63.276 5.518,63.276 6.518,63.276 7.518,63.276 8.518,63.276 9.518,63.276 10.518,63.276 11.518,63.276 12.518,63.276 13.518,63.276 14.518,63.276 15.518,63.276 16.518,63.276 17.518,63.276 18.518,63.276 20.518,63.276 48.518,63.276 57.518,63.276 58.518,63.276 59.518,63.276 2.018,64.276 3.018,64.276 4.018,64.276 5.018,64.276 6.018,64.276 7.018,64.276 8.018,64.276 9.018,64.276 10.018,64.276 11.018,64.276 12.018,64.276 13.018,64.276 14.018,64.276 15.018,64.276 16.018,64.276 17.018,64.276 18.018,64.276 20.018,64.276 21.018,64.276 44.018,64.276 45.018,64.276 48.018,64.276 53.018,64.276 57.018,64.276 58.018,64.276 59.018,64.276 60.018,64.276 1.518,65.276 2.518,65.276 3.518,65.276 4.518,65.276 5.518,65.276 6.518,65.276 7.518,65.276 8.518,65.276 9.518,65.276 10.518,65.276 11.518,65.276 12.518,65.276 13.518,65.276 14.518,65.276 15.518,65.276 16.518,65.276 17.518,65.276 18.518,65.276 20.518,65.276 22.518,65.276 23.518,65.276 43.518,65.276 44.518,65.276 56.518,65.276 57.518,65.276 58.518,65.276 59.518,65.276 2.018,66.276 3.018,66.276 4.018,66.276 5.018,66.276 6.018,66.276 7.018,66.276 8.018,66.276 9.018,66.276 10.018,66.276 11.018,66.276 12.018,66.276 13.018,66.276 14.018,66.276 15.018,66.276 16.018,66.276 17.018,66.276 18.018,66.276 20.018,66.276 21.018,66.276 32.018,66.276 33.018,66.276 40.018,66.276 43.018,66.276 44.018,66.276 45.018,66.276 55.018,66.276 57.018,66.276 58.018,66.276 59.018,66.276 60.018,66.276 1.518,67.276 2.518,67.276 3.518,67.276 4.518,67.276 5.518,67.276 6.518,67.276 7.518,67.276 11.518,67.276 12.518,67.276 13.518,67.276 14.518,67.276 15.518,67.276 16.518,67.276 17.518,67.276 18.518,67.276 20.518,67.276 22.518,67.276 37.518,67.276 43.518,67.276 44.518,67.276 55.518,67.276 56.518,67.276 57.518,67.276 58.518,67.276 59.518,67.276 12.018,68.276 13.018,68.276 17.018,68.276 18.018,68.276 20.018,68.276 21.018,68.276 23.018,68.276 37.018,68.276 38.018,68.276 41.018,68.276 43.018,68.276 44.018,68.276 52.018,68.276 55.018,68.276 56.018,68.276 57.018,68.276 58.018,68.276 59.018,68.276 60.018,68.276 3.518,69.276 4.518,69.276 5.518,69.276 6.518,69.276 7.518,69.276 12.518,69.276 14.518,69.276 16.518,69.276 17.518,69.276 18.518,69.276 20.518,69.276 22.518,69.276 23.518,69.276 43.518,69.276 44.518,69.276 45.518,69.276 55.518,69.276 56.518,69.276 57.518,69.276 58.518,69.276 59.518,69.276 2.018,70.276 3.018,70.276 4.018,70.276 5.018,70.276 6.018,70.276 7.018,70.276 10.018,70.276 13.018,70.276 14.018,70.276 15.018,70.276 16.018,70.276 17.018,70.276 18.018,70.276 21.018,70.276 31.018,70.276 32.018,70.276 33.018,70.276 34.018,70.276 35.018,70.276 37.018,70.276 38.018,70.276 55.018,70.276 56.018,70.276 57.018,70.276 58.018,70.276 59.018,70.276 60.018,70.276 1.518,71.276 2.518,71.276 3.518,71.276 4.518,71.276 5.518,71.276 6.518,71.276 12.518,71.276 13.518,71.276 16.518,71.276 17.518,71.276 18.518,71.276 20.518,71.276 26.518,71.276 32.518,71.276 33.518,71.276 34.518,71.276 35.518,71.276 37.518,71.276 38.518,71.276 39.518,71.276 55.518,71.276 56.518,71.276 57.518,71.276 58.518,71.276 59.518,71.276 2.018,72.276 3.018,72.276 4.018,72.276 5.018,72.276 6.018,72.276 7.018,72.276 10.018,72.276 13.018,72.276 14.018,72.276 17.018,72.276 18.018,72.276 30.018,72.276 33.018,72.276 34.018,72.276 35.018,72.276 37.018,72.276 38.018,72.276 39.018,72.276 40.018,72.276 46.018,72.276 56.018,72.276 57.018,72.276 58.018,72.276 59.018,72.276 60.018,72.276 1.518,73.276 2.518,73.276 3.518,73.276 4.518,73.276 5.518,73.276 6.518,73.276 12.518,73.276 13.518,73.276 16.518,73.276 17.518,73.276 18.518,73.276 21.518,73.276 30.518,73.276 31.518,73.276 32.518,73.276 33.518,73.276 34.518,73.276 35.518,73.276 37.518,73.276 38.518,73.276 39.518,73.276 44.518,73.276 45.518,73.276 46.518,73.276 47.518,73.276 2.018,74.276 3.018,74.276 4.018,74.276 5.018,74.276 6.018,74.276 7.018,74.276 8.018,74.276 12.018,74.276 22.018,74.276 30.018,74.276 31.018,74.276 32.018,74.276 33.018,74.276 34.018,74.276 35.018,74.276 37.018,74.276 38.018,74.276 39.018,74.276 40.018,74.276 42.018,74.276 52.018,74.276 56.018,74.276 57.018,74.276 60.018,74.276 1.518,75.276 2.518,75.276 3.518,75.276 4.518,75.276 5.518,75.276 6.518,75.276 7.518,75.276 13.518,75.276 16.518,75.276 21.518,75.276 26.518,75.276 33.518,75.276 34.518,75.276 35.518,75.276 37.518,75.276 38.518,75.276 39.518,75.276 42.518,75.276 46.518,75.276 47.518,75.276 55.518,75.276 56.518,75.276 57.518,75.276 59.518,75.276 2.018,76.276 3.018,76.276 4.018,76.276 5.018,76.276 6.018,76.276 7.018,76.276 8.018,76.276 9.018,76.276 18.018,76.276 30.018,76.276 31.018,76.276 32.018,76.276 38.018,76.276 39.018,76.276 44.018,76.276 45.018,76.276 47.018,76.276 60.018,76.276 1.518,77.276 2.518,77.276 3.518,77.276 4.518,77.276 5.518,77.276 6.518,77.276 7.518,77.276 17.518,77.276 24.518,77.276 30.518,77.276 31.518,77.276 32.518,77.276 34.518,77.276 43.518,77.276 46.518,77.276 55.518,77.276 56.518,77.276 57.518,77.276 58.518,77.276 59.518,77.276 2.018,78.276 5.018,78.276 6.018,78.276 7.018,78.276 8.018,78.276 16.018,78.276 18.018,78.276 24.018,78.276 32.018,78.276 33.018,78.276 56.018,78.276 57.018,78.276 4.518,79.276 7.518,79.276 12.518,79.276 14.518,79.276 15.518,79.276 17.518,79.276 18.518,79.276 23.518,79.276 24.518,79.276 30.518,79.276 43.518,79.276 55.518,79.276 56.518,79.276 2.018,80.276 3.018,80.276 5.018,80.276 7.018,80.276 8.018,80.276 12.018,80.276 15.018,80.276 18.018,80.276 22.018,80.276 23.018,80.276 24.018,80.276 56.018,80.276 57.018,80.276 58.018,80.276 59.018,80.276 60.018,80.276 3.518,81.276 7.518,81.276 8.518,81.276 10.518,81.276 11.518,81.276 12.518,81.276 13.518,81.276 14.518,81.276 15.518,81.276 17.518,81.276 18.518,81.276 22.518,81.276 26.518,81.276 29.518,81.276 30.518,81.276 34.518,81.276 55.518,81.276 56.518,81.276 57.518,81.276 58.518,81.276 59.518,81.276 2.018,82.276 3.018,82.276 8.018,82.276 9.018,82.276 12.018,82.276 13.018,82.276 14.018,82.276 15.018,82.276 16.018,82.276 18.018,82.276 24.018,82.276 55.018,82.276 56.018,82.276 57.018,82.276 58.018,82.276 59.018,82.276 60.018,82.276 1.518,83.276 2.518,83.276 3.518,83.276 4.518,83.276 5.518,83.276 7.518,83.276 8.518,83.276 9.518,83.276 12.518,83.276 13.518,83.276 14.518,83.276 15.518,83.276 16.518,83.276 18.518,83.276 19.518,83.276 27.518,83.276 56.518,83.276 57.518,83.276 58.518,83.276 59.518,83.276 3.018,84.276 8.018,84.276 9.018,84.276 12.018,84.276 13.018,84.276 14.018,84.276 15.018,84.276 16.018,84.276 17.018,84.276 23.018,84.276 24.018,84.276 28.018,84.276 29.018,84.276 30.018,84.276 41.018,84.276 43.018,84.276 50.018,84.276 51.018,84.276 52.018,84.276 56.018,84.276 57.018,84.276 58.018,84.276 59.018,84.276 60.018,84.276 1.518,85.276 2.518,85.276 7.518,85.276 8.518,85.276 11.518,85.276 12.518,85.276 13.518,85.276 14.518,85.276 15.518,85.276 16.518,85.276 17.518,85.276 18.518,85.276 21.518,85.276 22.518,85.276 23.518,85.276 24.518,85.276 27.518,85.276 28.518,85.276 29.518,85.276 34.518,85.276 41.518,85.276 56.518,85.276 57.518,85.276 58.518,85.276 59.518,85.276 2.018,86.276 5.018,86.276 12.018,86.276 17.018,86.276 18.018,86.276 22.018,86.276 29.018,86.276 30.018,86.276 35.018,86.276 36.018,86.276 56.018,86.276 4.518,87.276 5.518,87.276 9.518,87.276 12.518,87.276 16.518,87.276 19.518,87.276 29.518,87.276 30.518,87.276 33.518,87.276 34.518,87.276 35.518,87.276 38.518,87.276 39.518,87.276 40.518,87.276 55.518,87.276 56.518,87.276 2.018,88.276 3.018,88.276 4.018,88.276 5.018,88.276 6.018,88.276 9.018,88.276 18.018,88.276 19.018,88.276 50.018,88.276 55.018,88.276 56.018,88.276 1.518,89.276 2.518,89.276 3.518,89.276 4.518,89.276 5.518,89.276 6.518,89.276 9.518,89.276 17.518,89.276 18.518,89.276 19.518,89.276 21.518,89.276 57.518,89.276 58.518,89.276 59.518,89.276 2.018,90.276 3.018,90.276 4.018,90.276 5.018,90.276 6.018,90.276 7.018,90.276 8.018,90.276 12.018,90.276 18.018,90.276 19.018,90.276 22.018,90.276 26.018,90.276 35.018,90.276 36.018,90.276 37.018,90.276 38.018,90.276 39.018,90.276 40.018,90.276 41.018,90.276 42.018,90.276 43.018,90.276 48.018,90.276 49.018,90.276 50.018,90.276 57.018,90.276 58.018,90.276 59.018,90.276 60.018,90.276 1.518,91.276 2.518,91.276 3.518,91.276 5.518,91.276 6.518,91.276 7.518,91.276 8.518,91.276 12.518,91.276 17.518,91.276 18.518,91.276 19.518,91.276 26.518,91.276 27.518,91.276 28.518,91.276 29.518,91.276 30.518,91.276 32.518,91.276 35.518,91.276 36.518,91.276 37.518,91.276 38.518,91.276 39.518,91.276 40.518,91.276 41.518,91.276 42.518,91.276 45.518,91.276 51.518,91.276 57.518,91.276 58.518,91.276 59.518,91.276 2.018,92.276 3.018,92.276 6.018,92.276 7.018,92.276 8.018,92.276 9.018,92.276 10.018,92.276 13.018,92.276 14.018,92.276 16.018,92.276 18.018,92.276 19.018,92.276 35.018,92.276 37.018,92.276 38.018,92.276 39.018,92.276 40.018,92.276 41.018,92.276 42.018,92.276 57.018,92.276 58.018,92.276 59.018,92.276 60.018,92.276 1.518,93.276 2.518,93.276 3.518,93.276 6.518,93.276 7.518,93.276 8.518,93.276 9.518,93.276 10.518,93.276 13.518,93.276 14.518,93.276 17.518,93.276 18.518,93.276 19.518,93.276 21.518,93.276 22.518,93.276 23.518,93.276 24.518,93.276 25.518,93.276 26.518,93.276 37.518,93.276 38.518,93.276 39.518,93.276 40.518,93.276 41.518,93.276 42.518,93.276 45.518,93.276 51.518,93.276 57.518,93.276 58.518,93.276 59.518,93.276 2.018,94.276 3.018,94.276 4.018,94.276 5.018,94.276 7.018,94.276 8.018,94.276 9.018,94.276 10.018,94.276 11.018,94.276 16.018,94.276 18.018,94.276 19.018,94.276 23.018,94.276 24.018,94.276 35.018,94.276 37.018,94.276 39.018,94.276 40.018,94.276 41.018,94.276 42.018,94.276 46.018,94.276 47.018,94.276 48.018,94.276 49.018,94.276 50.018,94.276 51.018,94.276 57.018,94.276 58.018,94.276 59.018,94.276 60.018,94.276 1.518,95.276 2.518,95.276 3.518,95.276 4.518,95.276 5.518,95.276 6.518,95.276 7.518,95.276 8.518,95.276 9.518,95.276 10.518,95.276 11.518,95.276 17.518,95.276 18.518,95.276 19.518,95.276 22.518,95.276 23.518,95.276 25.518,95.276 26.518,95.276 32.518,95.276 33.518,95.276 34.518,95.276 36.518,95.276 37.518,95.276 39.518,95.276 40.518,95.276 41.518,95.276 42.518,95.276 46.518,95.276 47.518,95.276 48.518,95.276 49.518,95.276 50.518,95.276 51.518,95.276 57.518,95.276 58.518,95.276 59.518,95.276 2.018,96.276 3.018,96.276 7.018,96.276 8.018,96.276 9.018,96.276 10.018,96.276 11.018,96.276 14.018,96.276 18.018,96.276 19.018,96.276 20.018,96.276 23.018,96.276 24.018,96.276 26.018,96.276 28.018,96.276 29.018,96.276 39.018,96.276 41.018,96.276 42.018,96.276 46.018,96.276 47.018,96.276 48.018,96.276 49.018,96.276 50.018,96.276 51.018,96.276 53.018,96.276 54.018,96.276 57.018,96.276 58.018,96.276 59.018,96.276 60.018,96.276 1.518,97.276 2.518,97.276 6.518,97.276 7.518,97.276 8.518,97.276 9.518,97.276 10.518,97.276 14.518,97.276 22.518,97.276 28.518,97.276 33.518,97.276 38.518,97.276 39.518,97.276 41.518,97.276 42.518,97.276 46.518,97.276 47.518,97.276 48.518,97.276 49.518,97.276 50.518,97.276 51.518,97.276 53.518,97.276 54.518,97.276 55.518,97.276 56.518,97.276 2.018,98.276 3.018,98.276 7.018,98.276 8.018,98.276 9.018,98.276 10.018,98.276 14.018,98.276 16.018,98.276 23.018,98.276 24.018,98.276 26.018,98.276 29.018,98.276 31.018,98.276 34.018,98.276 36.018,98.276 39.018,98.276 41.018,98.276 42.018,98.276 47.018,98.276 48.018,98.276 49.018,98.276 50.018,98.276 51.018,98.276 53.018,98.276 54.018,98.276 55.018,98.276 56.018,98.276 1.518,99.276 2.518,99.276 3.518,99.276 5.518,99.276 6.518,99.276 7.518,99.276 8.518,99.276 9.518,99.276 10.518,99.276 14.518,99.276 20.518,99.276 21.518,99.276 52.518,99.276 53.518,99.276 54.518,99.276 55.518,99.276 56.518,99.276 2.018,100.276 3.018,100.276 4.018,100.276 5.018,100.276 7.018,100.276 8.018,100.276 9.018,100.276 10.018,100.276 11.018,100.276 12.018,100.276 13.018,100.276 14.018,100.276 16.018,100.276 18.018,100.276 52.018,100.276 53.018,100.276 54.018,100.276 55.018,100.276 56.018,100.276 57.018,100.276 58.018,100.276 59.018,100.276 60.018,100.276 1.518,101.276 2.518,101.276 3.518,101.276 5.518,101.276 6.518,101.276 7.518,101.276 8.518,101.276 9.518,101.276 10.518,101.276 11.518,101.276 12.518,101.276 13.518,101.276 14.518,101.276 17.518,101.276 18.518,101.276 30.518,101.276 31.518,101.276 32.518,101.276 33.518,101.276 35.518,101.276 44.518,101.276 45.518,101.276 46.518,101.276 48.518,101.276 49.518,101.276 53.518,101.276 54.518,101.276 55.518,101.276 56.518,101.276 57.518,101.276 58.518,101.276 59.518,101.276 7.018,102.276 8.018,102.276 9.018,102.276 10.018,102.276 14.018,102.276 19.018,102.276 20.018,102.276 21.018,102.276 22.018,102.276 23.018,102.276 31.018,102.276 32.018,102.276 33.018,102.276 36.018,102.276 39.018,102.276 43.018,102.276 46.018,102.276 47.018,102.276 49.018,102.276 50.018,102.276 51.018,102.276 54.018,102.276 55.018,102.276 56.018,102.276 57.018,102.276 58.018,102.276 59.018,102.276 60.018,102.276 6.518,103.276 7.518,103.276 8.518,103.276 9.518,103.276 10.518,103.276 13.518,103.276 18.518,103.276 19.518,103.276 20.518,103.276 21.518,103.276 22.518,103.276 23.518,103.276 46.518,103.276 49.518,103.276 50.518,103.276 51.518,103.276 54.518,103.276 55.518,103.276 59.518,103.276 2.018,104.276 3.018,104.276 7.018,104.276 8.018,104.276 9.018,104.276 14.018,104.276 19.018,104.276 20.018,104.276 21.018,104.276 22.018,104.276 23.018,104.276 60.018,104.276 2.518,105.276 4.518,105.276 5.518,105.276 6.518,105.276 13.518,105.276 30.518,105.276 31.518,105.276 32.518,105.276 46.518,105.276 48.518,105.276 59.518,105.276 2.018,106.276 14.018,106.276 23.018,106.276 24.018,106.276 25.018,106.276 26.018,106.276 30.018,106.276 31.018,106.276 32.018,106.276 33.018,106.276 34.018,106.276 35.018,106.276 47.018,106.276 57.018,106.276 59.018,106.276 60.018,106.276 2.518,107.276 4.518,107.276 5.518,107.276 6.518,107.276 11.518,107.276 12.518,107.276 13.518,107.276 14.518,107.276 21.518,107.276 22.518,107.276 24.518,107.276 25.518,107.276 26.518,107.276 30.518,107.276 31.518,107.276 32.518,107.276 33.518,107.276 34.518,107.276 35.518,107.276 39.518,107.276 42.518,107.276 46.518,107.276 49.518,107.276 50.518,107.276 56.518,107.276 59.518,107.276 10.018,108.276 11.018,108.276 12.018,108.276 13.018,108.276 14.018,108.276 15.018,108.276 16.018,108.276 17.018,108.276 18.018,108.276 19.018,108.276 22.018,108.276 25.018,108.276 26.018,108.276 27.018,108.276 28.018,108.276 29.018,108.276 30.018,108.276 31.018,108.276 32.018,108.276 33.018,108.276 34.018,108.276 35.018,108.276 36.018,108.276 39.018,108.276 42.018,108.276 43.018,108.276 46.018,108.276 47.018,108.276 48.018,108.276 52.018,108.276 56.018,108.276 57.018,108.276 58.018,108.276 59.018,108.276
  other v2: 40.791,38.029 41.791,38.029 42.791,38.029 40.791,39.029 41.791,39.029 42.791,39.029 40.791,40.029 41.791,40.029 42.791,40.029
Negative_Battery_Input: DP2.2 DP4.1 PWR.2 | length 30
  Top Layer w0.12: PWR.2@9.075,5.1 PWR.2@9.238,5.263
  Bottom Layer w1: PWR.2@9.075,5.1 9.075,5.262 9.4,5.587 DP4.1@9.4,13.52 9.4,19.85 12.075,22.525 12.075,30.38 DP2.2@9.775,32.68
NetC38_1: C38.1 R25.1 U11.1 | length 6
  Top Layer w0.5: U11.1@53.15,107.025 53.15,107.735 53.643,108.228 55.043,108.228 55.568,107.703 C38.1@55.568,106.753 55.868,106.453 R25.1@55.868,105.328
NetC60_2: C60.2 R77.1 SB81.1 SB82.1 | length 62.6
  Top Layer w0.12: v1(31.325,46.475) 34.402,46.475 34.407,46.48 52.28,46.48 53.65,47.85 v1(56.9,47.85) ; C60.2@52.466,60.604 v1(53.193,60.604) 53.193,61.081 53.437,61.325 v1(57.105,61.325)
  Bottom Layer w0.12: v1(31.325,46.475) 31.4,46.475 36.055,51.13 36.055,52.15 34.102,54.104 33.792,54.104 33.686,54.209 33.686,54.821 33.686,54.998 33.792,55.104 34.721,55.104 34.791,55.174 34.791,55.579 34.783,55.587 34.783,55.744 34.523,56.004 R77.1@34.366,56.004 34.466,56.104 SB82.1@34.466,57.529 ; v1(53.193,60.604) 53.091,60.604 53.091,60.304 53.891,59.504 SB81.1@53.891,58.879 ; v1(56.9,47.85) 56.9,47.939 57.105,48.144 v1(57.105,61.325)
NetC80_2: C80.2 C82.2 U15.6@43.741,40.279 | length 2.7
  Top Layer w0.3: U15.6@43.741,40.279 43.741,40.704 44.041,41.004 C82.2@44.941,41.004 C80.2@44.941,41.929
NetC81_2: C81.2 U15.5@43.741,39.779 X4.3 | length 4.9
  Top Layer w0.12: U15.5@43.741,39.779 43.741,39.809 46.296,39.809 46.941,40.454 X4.3@47.241,40.454 C81.2@47.241,41.579
NetC83_2: C83.2 R53.1 X4.1 | length 4.6
  Top Layer w0.12: R53.1@46.116,39.279 46.116,38.675 46.441,38.35 48.025,38.35 48.244,38.569 48.244,39.057 X4.1@48.291,39.104 C83.2@49.366,39.104
NetC84_2: C84.2 C85.1 C86.2 C87.2 C88.2 C89.2 L2.1 R78.2 R79.2 R80.2 R81.2 U15.1@43.741,37.779 U15.19 U16.5 U17.2 U17.7 | length 43.3
  Top Layer w0.12: v1(39.041,34.279) 39.041,29.171 C88.2@39.221,28.991
  Top Layer w0.3: C88.2@39.196,28.966 39.221,28.991 v1(39.921,28.991) ; v1(39.216,35.879) C85.1@38.566,35.879 38.566,36.579 39.066,37.079 U15.19@40.541,37.079 ; v1@39.917,29 40.513,29 41.791,30.279 U16.5@41.791,31.529 ; U15.1@43.741,37.779 44.016,37.779 44.316,37.479 v1(44.316,37.104) C84.2@44.941,36.479 ; v1(50.129,29.409) C89.2@50.829,29.409
  Top Layer w0.4: U17.7@42.271,27.834 42.271,28.289 42.675,28.693 v1(42.675,29.665) ; U17.2@48.621,27.834 48.625,27.838 v1@48.625,28.85
  Top Layer w0.5: L2.1@35.665,34.275 L2.1@35.666,34.274 ; L2.1@35.666,34.254 L2.1@35.666,34.274 ; v1(39.041,34.279) C87.2@38.391,34.279 37.121,34.279 37.075,34.232 35.708,34.232 L2.1@35.666,34.274
  Signal Layer 1 w0.2: v1(44.141,34.329) 44.141,36.84 44.316,37.015 v1(44.316,37.104)
  Bottom Layer w0.12: v1(39.041,34.279) 39.041,34.368 39.216,34.543 v1(39.216,35.879) ; v1(39.921,28.991) 40.503,28.991 41.237,29.725 42.615,29.725 v1(42.675,29.665) ; v1@42.675,29.725 44.5,29.725 45.321,28.904 v1(48.616,28.904) 48.651,28.939 48.651,29.201 48.859,29.409 v1(50.129,29.409)
  Bottom Layer w0.4: v1(39.041,34.279) 39.091,34.329 R81.2@40.291,34.329 R80.2@41.291,34.329 R79.2@42.291,34.329 R78.2@43.291,34.329 v1(44.141,34.329)
NetC90_2: C90.2 R55.1 R56.1 R57.1 R58.1 | length 37.1
  Top Layer w0.3: R55.1@38.241,19.304 R55.1@38.291,19.354 R55.1@38.316,19.329 ; R56.1@52.616,19.379 52.666,19.329 R56.1@52.716,19.379
  Top Layer w0.5: R57.1@36.191,19.354 R58.1@37.241,19.354 ; R55.1@38.291,19.354 R58.1@37.241,19.354 ; v1(39.241,21.929) C90.2@37.966,21.929 37.241,21.204 R58.1@37.241,19.354 ; v1(51.891,19.329) 52.666,19.329 v1(52.666,18.554)
  Signal Layer 2 w0.5: v1(39.241,21.929) 39.241,26.816 40.7,28.275 51.9,28.275 53.6,26.575 53.6,19.488 v1(52.666,18.554) ; v1@51.875,19.375 51.828,19.375 51.875,19.329 v1(51.891,19.329)
NetCN14_4: CN14.4 CN14.5 R57.2 | length 17.9
  Top Layer w0.5: R57.2@36.191,18.454 36.191,17.329 37.341,16.179 38.116,16.179 42.441,11.854 43.366,11.854 45.216,10.004 46.963,10.004 CN14.5@47.959,11 48.979,12.02 CN14.4@48.979,12.1
NetCN14_7: CN14.7 CN14.8 R58.2 | length 12.3
  Top Layer w0.5: R58.2@37.241,18.454 37.241,17.704 37.891,17.054 38.791,17.054 43.22,12.625 44.356,12.625 44.881,12.1 CN14.8@44.899,12.1 45.919,11.08 CN14.7@45.919,11
NetCN14_9: CN14.9 R61.2 | length 3.9
  Top Layer w0.3: CN14.9@55.529,9.92 55.529,10.916 56.591,11.979 R61.2@57.966,11.979
NetCN14_10: CN14.10 U15.3@43.741,38.779 | length 39
  Top Layer w0.3: U15.3@43.741,38.779 44.391,38.779 45.441,37.729 49.1,37.729 56.225,30.604 56.225,12.975 CN14.10@53.275,10.025 ; CN14.10@53.239,9.92 54.191,10.872
NetCN14_11: CN14.11 R62.2 | length 5.2
  Top Layer w0.3: R62.2@38.966,11.029 42.589,11.029 CN14.11@43.699,9.92